# Altium PCB 8A8K最小系统.PcbDoc
Units mil, origin at the board's own origin, x right, y up, seen from the top; angles counter-clockwise.
Board outline 6000 x 4000 mil, 2 copper layers (Top Layer, Bottom Layer); 40 components, 71 nets, 206 pads, 185 vias.
Unrouted connection lines stored in the file: 5.
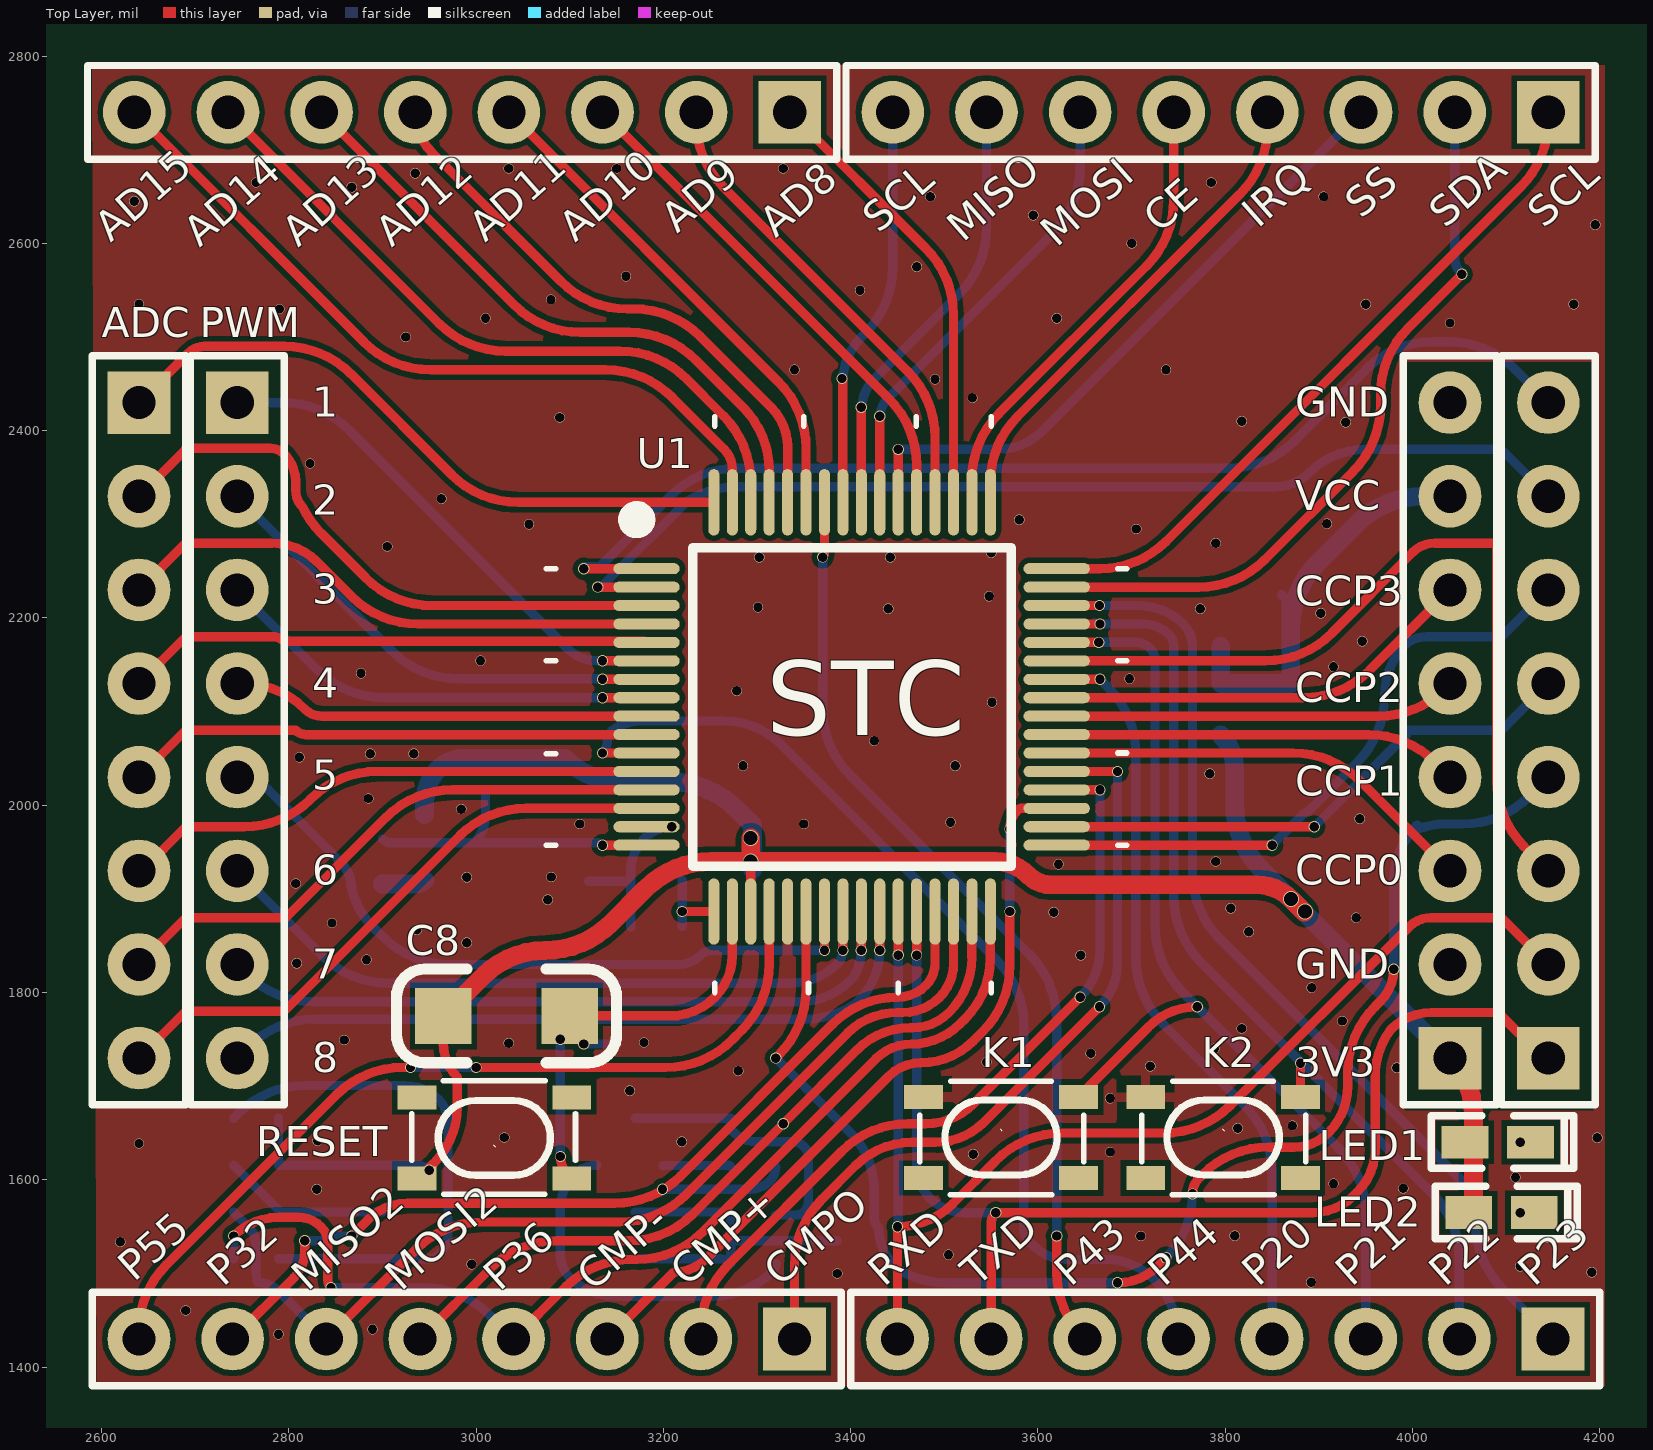
[diagram p0: Top Layer view]
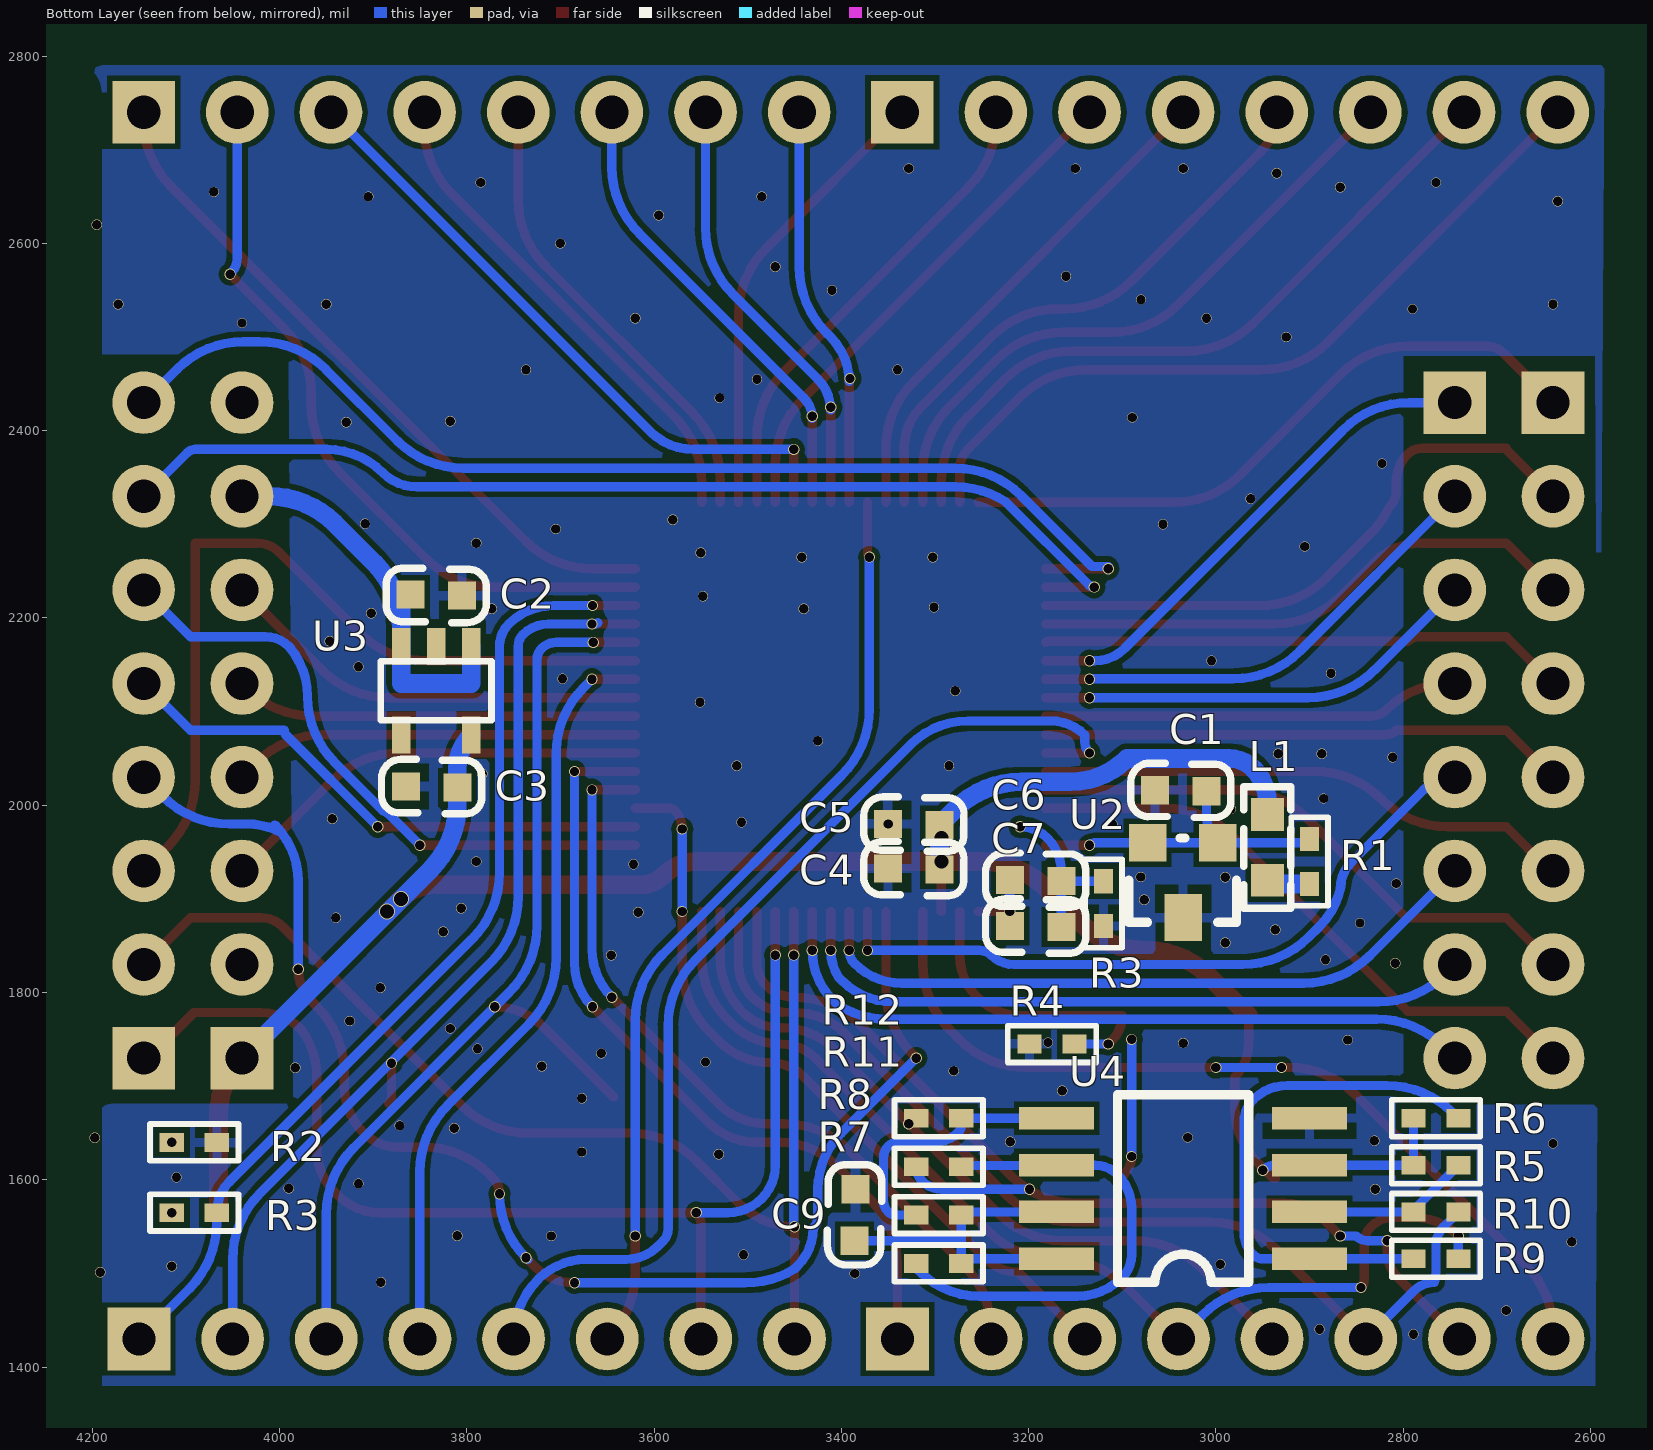
[diagram p1: Bottom Layer view, seen from below]

## Layer stack, top to bottom
Top Solder: solder mask 0.4, Solder Resist, Dk 3.5
Top Layer: signal copper 1.4
Dielectric 1: dielectric 12.6, FR-4, Dk 4.8
Bottom Layer: signal copper 1.4
Bottom Solder: solder mask 0.4, Solder Resist, Dk 3.5

## Board outline
1000,1000 7000,1000 7000,5000 1000,5000

## Design rules (kind name [scope] priority, off if disabled: settings)
Clearance [All] p1: gap=6 ignorepadtopadclearanceinfootprint=TRUE
PolygonConnect [All] p1: connectstyle=Relief reliefconductorwidth=10 reliefentries=4 polygonreliefangle="90 Angle" airgapwidth=10
RoutingVias [All] p1: holewidth=28 width=50 viastyle="Through Hole" minholewidth=28 minwidth=50 maxholewidth=28 maxwidth=50
SolderMaskExpansion [All] p1: expansion=4
Width [All] p1: maxlimit=100 minlimit=10 preferedwidth=10
30 further rules are at their usual default settings.

## Classes and differential pairs
component class 8A8K最小系统: C1 C2 C3 C4 C5 C6 C7 C8 C9 L1 LED1 LED2 R1 R2 R3 R4 R5 R6 R7 R8 R9 R10 R11 R12 U1 U2 U3

## Components (designator, comment, footprint, x,y, rotation, side; value= is the part's Value field where it differs from the comment)
C1 "0.1uF" 0603C 3009.79,2014.65 r0 bottom
C2 "1uF" 0603C 3860.21,2225.35 r180 bottom
C3 "1uF" 0603C 3809.79,2018.65 r0 bottom
C4 "0.1uF" 0603C 3294.85,1931 r0 bottom
C5 "47uF" 0603C 3294.85,1978.65 r0 bottom
C6 "22uF" 0603C 3164.79,1918.65 r0 bottom
C7 "0.1uF" 0603C 3164.79,1869.65 r0 bottom
C8 "22uF" 1206C 2965,1775.06 r0 top
C9 "1uF" 0603C 3384.49,1590.21 r270 bottom
K1 "KEY1" "ALPS key" 3555,1645 r90 top (schematic designator K2)
K2 "KEY2" "ALPS key" 3792.16,1645 r90 top (schematic designator K3)
L1 "220uH" 0603L 2945,1990 r270 bottom
LED1 "红色" "LED 0603R" 4091,1640 r0 top
LED2 "红色" "LED 0603R" 4095,1564.74 r0 top
R1 "511R" "R 0402_M" 2900,1940 r90 bottom
R2 "1K" "R 0402_M" 4091,1640 r180 bottom
R3 "1K" "R 0402_M" 4091,1565 r180 bottom
R3 "0R" "R 0402_M" 3120,1895 r90 bottom
R4 "331R" "R 0402_M" 3175,1745 r0 bottom
R5 "331R" "R 0402_M" 2765,1615.71 r0 bottom
R6 "331R" "R 0402_M" 2765,1665.77 r0 bottom
R7 "331R" "R 0402_M" 3296,1510.71 r180 bottom
R8 "331R" "R 0402_M" 3296,1562.4 r180 bottom
R9 "331R" "R 0402_M" 2765,1515.71 r0 bottom
R10 "331R" "R 0402_M" 2765,1565.71 r0 bottom
R11 "331R" "R 0402_M" 3296,1614.09 r0 bottom
R12 "331R" "R 0402_M" 3296,1665.77 r0 bottom
RESET "RESET" "ALPS key" 3025,1645 r270 top (schematic designator K1)
U1 "STC8A8K64S4A12" LQFP64-10*10 3401.52,2105 r270 top
U2 "TL431" SOT23 2993.12,1960.63 r0 bottom
U3 "LP5907" SOT23-5 3795.2,2169.49 r0 bottom
U4 "W25Q128" SOIC8 2900,1515.71 r0 bottom
? "HDR-1X8" HDR2.54-LI-8P 2990,1430 r180 top
? "HDR-1X8" HDR2.54-LI-8P 3800,1430 r180 top
? "HDR-1X8" HDR2.54-LI-8P 3795,2740 r180 top
? "HDR-1X8" HDR2.54-LI-8P 2985,2740 r180 top
? "HDR-1X8" HDR2.54-LI-8P 4040,2080 r90 top
? "HDR-1X8" HDR2.54-LI-8P 4145,2080 r90 top
? "HDR-1X8" HDR2.54-LI-8P 2745,2080 r270 top
? "HDR-1X8" HDR2.54-LI-8P 2640,2080 r270 top

## Footprints (in the part's own frame and the unit in brackets; to place one, negate y for a bottom-side part, rotate by r counter-clockwise, add the part's x,y. Pads: shape width x height; smd on the part's side, far side on the other; paste and mask are expansions set on the pad)
0603C [mil]
  rect 30x30 smd: 1(0.21,-0.35) 2(55.21,-1.35)
  silkscreen extent -26,-30 81,28, body extent -1,-15 62,17, height 12
0603L [mil] "小功率贴片电感"
  rect 35x35 smd: 1(0,0) 2(70,0)
  silkscreen extent -30,-25 100,25, body extent 4,-17 66,15, height 31
1206C [mil]
  rect 60x60 smd: 1(0,0) 2(135,0)
  silkscreen extent -50,-50 185,50, body extent 2,-31 128,31, height 39
"ALPS key" [mm]
  rect 0.65x1.05 smd: 1(1.106,-2.24) 2(1.106,1.96) 3(-1.094,-2.24) 4(-1.094,1.96)
  silkscreen extent -1.54,-2.38 1.53,2.06
HDR2.54-LI-8P [mm] "排针，8脚"
  rect 1.7x1.7 hole 0.9: 1(-8.89,0)
  round 1.7 hole 0.9: 2(-6.35,0) 3(-3.81,0) 4(-1.27,0) 5(1.27,0) 6(3.81,0) 7(6.35,0) 8(8.89,0)
  silkscreen extent -10.16,-1.27 10.16,1.27, body extent -10.16,-1.27 10.16,1.27, height 8.5
"LED 0603R" [mil] "红色0603LED"
  rect 50x35 smd: 1(-35,0.26) 2(35,0.26)
  silkscreen extent -71,-28 81,28, body extent -31,-16 31,16, height 18
LQFP64-10*10 [mm] "10x10mm，0.5mm（蒜米工坊）"
  oval 0.3x1.8 smd: 1(-3.75,-5.575) 2(-3.25,-5.575) 3(-2.75,-5.575) 4(-2.25,-5.575) 5(-1.75,-5.575) 6(-1.25,-5.575) 7(-0.75,-5.575) 8(-0.25,-5.575) 9(0.25,-5.575) 10(0.75,-5.575) 11(1.25,-5.575) 12(1.75,-5.575) 13(2.25,-5.575) 14(2.75,-5.575) 15(3.25,-5.575) 16(3.75,-5.575) 33(3.75,5.55) 34(3.25,5.55) 35(2.75,5.55) 36(2.25,5.55) 37(1.75,5.55) 38(1.25,5.55) 39(0.75,5.55) 40(0.25,5.55) 41(-0.25,5.55) 42(-0.75,5.55) 43(-1.25,5.55) 44(-1.75,5.55) 45(-2.25,5.55) 46(-2.75,5.55) 47(-3.25,5.55) 48(-3.75,5.55)
  oval 1.8x0.3 smd: 17(5.55,-3.75) 18(5.55,-3.25) 19(5.55,-2.75) 20(5.55,-2.25) 21(5.55,-1.75) 22(5.55,-1.25) 23(5.55,-0.75) 24(5.55,-0.25) 25(5.55,0.25) 26(5.55,0.75) 27(5.55,1.25) 28(5.55,1.75) 29(5.55,2.25) 30(5.55,2.75) 31(5.55,3.25) 32(5.55,3.75) 49(-5.55,3.75) 50(-5.55,3.25) 51(-5.55,2.75) 52(-5.55,2.25) 53(-5.55,1.75) 54(-5.55,1.25) 55(-5.55,0.75) 56(-5.55,0.25) 57(-5.55,-0.25) 58(-5.55,-0.75) 59(-5.55,-1.25) 60(-5.55,-1.75) 61(-5.55,-2.25) 62(-5.55,-2.75) 63(-5.55,-3.25) 64(-5.55,-3.75)
  silkscreen extent -5.33,-6.09 4.32,4.32, body extent -6,-6 6,6, height 1.45
"R 0402_M" [mil] "1/16W贴片电阻"
  rect 26x20 smd: 1(-24,0) 2(24,0)
  silkscreen extent -47,-20 47,20, body extent -20,-10 20,10, height 12
SOIC8 [mil]
  rect 80x24 smd: 1(0,0) 2(0,-50.06) 3(0,-100.06) 4(0,-150.06) 5(270,-150) 6(270,-100) 7(270,-50) 8(270,0)
  silkscreen extent 65,-175 205,25, body extent 13,-174 257,23, height 69
SOT23 [mil]
  rect 40x40 smd: 1(4.88,0.63) 3(79.88,0.63)
  rect 40x50 smd: 2(41.88,80.63)
  silkscreen extent -15,-4 100,86, body extent -15,-11 99,99, height 47
SOT23-5 [mm]
  rect 0.5x1 smd: 1(0,0) 2(0.95,0) 3(1.9,0) 4(1.9,2.4) 5(0,2.4)
  silkscreen extent -0.55,0.4 2.45,2, body extent -0.5,-0.2 2.4,2.6, height 1.09

## Part data
C1 C2 C3 C4 C5 C6 C7 C8 C9: library part CAP, "无极性电容"
K1 K2 RESET: library part KEY
L1: library part INDUCTOR, "INDUCTOR"
LED1 LED2: library part LED-SMD, "贴片LED", BOM名称=Ì, 学习资源=www.oooc
R1 R2 R3 R3 R4 R5 R6 R7 R8 R9 R10 R11 R12: library part RES
U1: BOM_LCSC Assembly=Yes, BOM_Manufacturer=STC, BOM_Manufacturer Part=STC8A8K64S4A12, BOM_Supplier=LCSC, BOM_Supplier Part=C86615, SMT Type=Extend, spicePre=U, spiceSymbolName=STC8A8K64S4A12
U2: BOM_LCSC Assembly=Yes, BOM_Manufacturer=SK, BOM_Manufacturer Part=TL431, BOM_Supplier=LCSC, BOM_Supplier Part=C111578, SMT Type=Extend, spicePre=U, spiceSymbolName=TL431
U3: library part LP5907QMFX-3.0Q1, BOM_LCSC Assembly=Yes, BOM_Manufacturer=TI, BOM_Manufacturer Part=LP5907QMFX-3.0Q1, BOM_Supplier=LCSC, BOM_Supplier Part=C132018, Contributor=LCSC, SMT Type=Extend, spicePre=U, spiceSymbolName=LP5907QMFX-3.0Q1
? ? ? ? ? ? ? ?: library part "Header 8", "8P接插件", BOM名称=8P接, 学习资源=www.ooocke.

## Via types
v1: diameter 11, hole 10, Top Layer to Bottom Layer, tented both sides, 124 vias
v2: diameter 12, hole 10, Top Layer to Bottom Layer, tented both sides, 57 vias
v3: diameter 17, hole 15, Top Layer to Bottom Layer, tented both sides, 4 vias

## Nets (pads, with @x,y where several pads share a name; then routed paths per layer and width w, separated by ;. In a path a pad name is that pad's centre, name@x,y a point inside that pad or via, vN(x,y) a via of type N, cw(c..) or ccw(c..) an arc to the next point about the centre after c; other vN are vias at no path point)
3V3: ?.1@4040,1730 C3.1 C4.1 C5.1 C8.1 C9.2 L1.1 LED1.1 LED2.1 R5.2 R6.2 R7.2 R8.2 RESET.1 U1.19 U3.5 U4.3 U4.7 U4.8 | length 2919.3
  Top Layer w10: RESET.1 ccw(c2936.8,1605.5) 2939.65,1602.64 2955,1618 ccw(c2894.64,1678.35) 2980,1678.35 2980,1709.64 cw(c3016.21,1745.86) 2965,1745.86 C8.1 ; U1.19 v3(3293.26,1940)
  Top Layer w20: C8.1 3007.61,1817.68 ; 3007.63,1817.69 cw(c3073.58,1751.71) 3073.58,1845 ccw(c3073.58,1945) 3144.29,1874.29 3180.71,1910.71 cw(c3251.42,1840) 3251.42,1940 v3(3293.26,1940) ; v3(3293.26,1965) v3(3293.26,1940) ; v3@3884.25,1885.75 v3(3870,1900) ccw(c3833.79,1863.79) 3833.79,1915 3614.14,1915 cw(c3614.14,1949.14) 3590,1925 ccw(c3553.79,1888.79) 3553.79,1940 v3(3293.26,1940) ; ?.1@4040,1730 cw(c3979.63,1669.63) 4065,1669.63 LED2.1@4065,1565
  Bottom Layer w10: R6.2 R5.2 2899.94,1615.71 U4.3 2936.46,1615.77 cw(c2936.46,1596.63) v2(2950,1610.17) ; U4.8 3259.93,1515.71 cw(c3259.93,1498.64) R7.2 3272,1536.55 ; U4.7 3264,1565.71 cw(c3264,1554.4) R8.2 3272,1536.55 ; C9.2 3275.75,1535 cw(c3275.75,1540.31) 3272,1536.55
  Bottom Layer w20: L1.1 2945,2003.05 cw(c2996.21,2003.05) 2960,2039.26 cw(c2985.92,2013.34) 2985.92,2050 3095,2050 ccw(c3155.36,2110.36) 3155.36,2025 3207.64,2025 cw(c3207.64,1925) 3278.35,1995.71 C5.1 C4.1 ; U3.5 cw(c3759.46,2039.26) 3810,2039.26 C3.1 3810,2001.42 ccw(c3910,2001.42) 3839.29,1930.71 ?.1@4040,1730
  other v3: 3885,1886.5
ADC0: ?.1@2640,2430 U1.64 | length 698.1
  Top Layer w10: ?.1@2640,2430 2692.93,2482.93 cw(c2710,2465.86) 2710,2490 2795.56,2490 cw(c2795.56,2390) 2866.27,2460.71 2974.19,2352.79 ccw(c3044.9,2423.5) 3044.9,2323.5 U1.64
ADC1: ?.2@2640,2330 U1.3 | length 650.1
  Top Layer w10: ?.2@2640,2330 2689.1,2379.1 ccw(c2686.94,2381.27) 2690,2381.27 2780,2381.27 cw(c2780,2359.76) 2795.21,2374.97 ; 2795.23,2374.95 cw(c2765.96,2345.72) 2797.63,2372.32 cw(c2765.96,2345.72) 2805.02,2359.32 cw(c2765.96,2345.72) 2807.32,2345.72 2807.32,2336.26 ccw(c2832.33,2336.26) 2814.65,2318.57 ccw(c2905,2361.42) 2834.29,2290.71 2882.44,2242.56 ccw(c2953.15,2313.27) 2953.15,2213.27 U1.3
ADC2: ?.3@2640,2230 U1.4 | length 591.3
  Top Layer w10: ?.3@2640,2230 2690,2280 2781.72,2280 cw(c2781.72,2211.72) 2830,2260 2867.13,2222.87 ccw(c2937.84,2293.58) 2937.84,2193.58 U1.4
ADC3: ?.4@2640,2130 U1.5 | length 564.4
  Top Layer w10: ?.4@2640,2130 2690,2180 2782.93,2180 cw(c2782.93,2162.93) 2795,2175 3179.36,2175 cw(c3179.36,2171.24) U1.5
ADC4: ?.5@2640,2030 U1.10 | length 563.9
  Top Layer w10: ?.5@2640,2030 2690,2080 2807.31,2080 ccw(c2818.24,2090.93) 2818.24,2075.47 U1.10
ADC5: ?.6@2640,1930 U1.12 | length 577.1
  Top Layer w10: ?.6@2640,1930 ccw(c2640,1937.13) 2645.04,1932.09 2690,1977.05 2752.34,1977.05 ccw(c2752.34,2077.05) 2823.05,2006.34 2823.53,2006.81 cw(c2894.24,1936.1) 2894.24,2036.1 U1.12
ADC6: ?.7@2640,1830 U1.13 | length 614.9
  Top Layer w10: ?.7@2640,1830 2690,1880 2796.72,1880 2903.84,1987.13 cw(c2974.55,1916.42) 2974.55,2016.42 U1.13
ADC7: ?.8@2640,1730 U1.14 | length 648.2
  Top Layer w10: ?.8@2640,1730 2690,1780 2795,1780 2982.44,1967.44 cw(c3053.15,1896.73) 3053.15,1996.73 U1.14
ADC8: ?.1@3335,2740 U1.51 | length 484.6
  Top Layer w10: ?.1@3335,2740 3480.5,2594.5 cw(c3409.79,2523.79) 3509.79,2523.79 U1.51
ADC9: ?.2@3235,2740 U1.52 | length 513.6
  Top Layer w10: ?.2@3235,2740 3235,2730.71 ccw(c3335,2730.71) 3264.29,2660 3460.82,2463.47 cw(c3390.11,2392.76) 3490.11,2392.76 U1.52
ADC10: ?.3@3135,2740 U1.53 | length 551.1
  Top Layer w10: ?.3@3135,2740 3441.13,2433.87 cw(c3370.42,2363.16) 3470.42,2363.16 U1.53
ADC11: ?.4@3035,2740 U1.59 | length 543.6
  Top Layer w10: ?.4@3035,2740 3323.02,2451.98 cw(c3252.31,2381.27) 3352.31,2381.27 U1.59
ADC12: ?.5@2935,2740 U1.60 | length 620.1
  Top Layer w10: ?.5@2935,2740 ccw(c2995.36,2740) 2952.68,2697.32 3090.71,2559.29 ccw(c3161.42,2630) 3161.42,2530 3168.58,2530 cw(c3168.58,2430) 3239.29,2500.71 3315,2425 cw(c3272.45,2382.45) 3332.63,2382.45 U1.60
ADC13: ?.6@2835,2740 U1.61 | length 680.8
  Top Layer w10: ?.6@2835,2740 3040.71,2534.29 ccw(c3111.42,2605) 3111.42,2505 3163.58,2505 cw(c3163.58,2405) 3234.29,2475.71 3285,2425 cw(c3217.55,2357.55) 3312.94,2357.55 U1.61
ADC14: ?.7@2735,2740 U1.62 | length 754.9
  Top Layer w10: ?.7@2735,2740 2960.71,2514.29 ccw(c3031.42,2585) 3031.42,2485 3153.58,2485 cw(c3153.58,2385) 3224.29,2455.71 3263.97,2416.03 cw(c3193.26,2345.32) 3293.26,2345.32 U1.62
ADC15: ?.8@2635,2740 U1.63 | length 829.3
  Top Layer w10: ?.8@2635,2740 2880.71,2494.29 ccw(c2951.42,2565) 2951.42,2465 3138.58,2465 cw(c3138.58,2365) 3209.29,2435.71 3265,2380 cw(c3244.31,2359.31) 3273.57,2359.31 U1.63
AGND: C6.1 C7.1 R3.2@3120,1919 U1.15 | length 176.3
  Bottom Layer w10: R3.2@3120,1919 C6.1 ; C7.1 C6.1 ; v2(3209.08,1977.05) ccw(c3209.08,1935.92) 3180,1965 ccw(c3216.21,1928.79) 3165,1928.79 C6.1
AVcc: C6.2 C7.2 L1.2 R1.1 U1.17 | length 129
  Top Layer w10: v2(3220,1886.5) U1.17
  Bottom Layer w10: C7.2 C6.2
  Bottom Layer w20: R1.1 2935.34,1916 ccw(c2935.34,1929.66) L1.2
AVref: C1.1 R1.2 U1.16 U2.1 U2.3 | length 342
  Top Layer w10: v2(3135,1957.36) U1.16
  Bottom Layer w10: R1.2 ccw(c2909.66,1973.66) 2909.66,1960 U2.1 ; C1.1 3010,1988.97 cw(c2969.03,1988.97) U2.1 ; v2(3135,1957.36) ccw(c3128.63,1950.99) 3128.63,1960 U2.3 U2.1
CCP0: ?.3@4040,1930 U1.38 | length 467.8
  Top Layer w10: U1.38 3872.79,2055.79 cw(c3872.79,1955.79) 3943.5,2026.5 ?.3@4040,1930
CCP1: ?.4@4040,2030 U1.39 | length 434.5
  Top Layer w10: U1.39 3953.11,2075.47 cw(c3953.11,1975.47) 4023.82,2046.18 ?.4@4040,2030
CCP2: ?.5@4040,2130 U1.40 | length 430.1
  Top Layer w10: U1.40 3963.74,2095.16 ccw(c3963.74,2195.16) 4034.45,2124.45 ?.5@4040,2130
CCP3: ?.6@4040,2230 U1.41 | length 463.4
  Top Layer w10: U1.41 3883.42,2114.84 ccw(c3883.42,2214.84) 3954.13,2144.13 ?.6@4040,2230
CE: ?.5@3745,2740 U1.50 | length 497.2
  Top Layer w10: U1.50 3529.48,2348.05 cw(c3629.48,2348.05) 3558.77,2418.77 3715.71,2575.71 ccw(c3645,2646.42) 3745,2646.42 ?.5@3745,2740
CMP+: ?.2@3240,1430 U1.36 | length 848.1
  Top Layer w10: ?.2@3240,1430 3240,1438.58 cw(c3340,1438.58) 3269.29,1509.29 3390.71,1630.71 cw(c3461.42,1560) 3461.42,1660 3480.31,1660 ccw(c3480.31,1731.67) 3530.99,1680.99 v2@3645.71,1795.71 ; U1.36 v2(3666.22,2016.42)
  Bottom Layer w10: v2(3645,1795) ccw(c3593.78,1846.22) 3666.22,1846.22 v2(3666.22,2016.42)
CMP-: ?.3@3140,1430 U1.35 | length 818.1
  Top Layer w10: ?.3@3140,1430 3211.46,1501.46 ccw(c3211.46,1549.75) 3245.61,1515.61 3440.86,1710.86 cw(c3475,1676.72) 3475,1725 ccw(c3475,1803.77) 3530.7,1748.07 3540.71,1758.08 ccw(c3470,1828.79) 3570,1828.79 v2(3570,1886.5) ; v2(3570,1974.6) cw(c3598.85,1974.6) 3578.45,1995 cw(c3582.63,1990.82) 3582.63,1996.73 U1.35
  Bottom Layer w10: v2(3570,1886.5) v2(3570,1974.6)
CMPO: ?.1@3340,1430 U1.37 | length 853.2
  Top Layer w10: ?.1@3340,1430 3340,1508.58 cw(c3440,1508.58) 3369.29,1579.29 3405,1615 cw(c3465.36,1554.64) 3465.36,1640 3490.11,1640 ccw(c3490.11,1714.17) 3542.56,1661.73 v2(3665.71,1784.88) ; U1.37 v2(3685,2036.1)
  Bottom Layer w10: v2(3665.71,1784.88) ccw(c3619.14,1831.45) 3685,1831.45 v2(3685,2036.1)
GND: ?.2@4040,1830 ?.8@4040,2430 C1.2 C2.2 C3.2 C4.2 C5.2 C9.1 K1.2 K2.2 R2.2 R3.1@3120,1871 R4.2 U1.21 U2.2 U3.2 U4.4
  other v1: 2789,1435 2889.31,1440.3 2690,1460.44 3891.66,1490.74 3385.75,1500 4191.41,1501.46 4115,1507.67 2995.19,1510 3504.51,1520 2620.1,1533.71 3709.64,1540 3810,1540.36 2829.7,1590 3990,1590.83 3915.53,1596 4110,1602.72 3530.99,1627.43 3677.01,1629.68 2640,1638.88 3219.55,1640.71 2830.71,1641.82 3030,1645.28 4197.25,1645 3813.19,1655 3871.71,1657.95 3677.01,1687.22 3164.02,1695 3280,1716.32 3983.18,1719.83 3720,1721.35 3545,1725.89 3656.42,1735 3788.45,1740 3035,1746.06 3179.36,1746.62 2859.11,1749.35 3817.68,1761.68 3924.82,1769.68 3892.2,1804.99 2808.61,1831.35 2882.91,1835.19 3645.71,1839.83 2990,1853.25 3825.1,1865 2936.46,1867.22 2846.11,1874.26 3939.7,1880 3616.85,1885.75 3805.94,1890 3076.55,1899 2807.32,1916.51 2990,1923.06 3080.16,1923.45 3621.85,1937.13 3790,1940 3110.71,1980 3350.06,1980 3506.55,1981.73 3943.5,1985.61 2984.1,1995.94 2885,2007.25 3783.45,2033.69 3285,2042.17 3511.55,2042.17 2811.33,2051.14 2887.01,2055 2933.3,2055 3425,2068.73 3550.89,2110 3278.35,2122.13 3697.75,2135 2877.11,2141.06 3915.53,2148.07 3004.68,2154.21 3946.2,2175 3902.07,2205 3440,2210 3773.15,2210 3301,2211.4 3547.78,2223.14 3302.44,2265 3442.35,2265 3550,2269.68 2905,2276.3 3790,2280 3705,2295 3056.43,2300 3908.55,2300.71 3580,2305 2962.94,2327.22 2822.69,2365 3928.64,2409.1 3817.68,2410 3089.23,2414.15 3530,2435 3490,2455 3340,2465 3736.72,2465 2925,2500 4040,2515 3010,2520 3620,2520 2790,2530 2640,2535 3950,2535 4172,2535 3080,2540 3410,2550 3160,2565 3470.42,2575 3700,2600 4195,2620 3595,2630 2635,2645 3485,2650 3905,2650 4070,2655 2867.13,2660 2765,2665 3785,2665 2935,2675 3035,2680 3150,2680 3327.94,2680
IRQ: ?.4@3845,2740 U1.49 | length 530.4
  Top Layer w10: U1.49 3549.16,2344.67 cw(c3649.16,2344.67) 3578.45,2415.38 3815.71,2652.64 ccw(c3745,2723.35) 3845,2723.35 ?.4@3845,2740
MISO: ?.7@3545,2740 U1.56 | length 468.4
  Top Layer w10: U1.56 v2(3411.37,2424.99)
  Bottom Layer w10: v2@3411.37,2422.08 cw(c3457.92,2422.08) 3425,2455 3515.71,2545.71 ccw(c3445,2616.42) 3545,2616.42 ?.7@3545,2740
MISO2: ?.6@2840,1430 R10.1 U1.30 | length 1068.6
  Top Layer w10: ?.6@2840,1430 2935.71,1525.71 cw(c3006.42,1455) 3006.42,1555 3153.58,1555 ccw(c3153.58,1655) 3224.29,1584.29 3396.54,1756.54 cw(c3450,1703.09) 3450,1778.69 3455.62,1778.69 ccw(c3455.62,1834.38) 3495,1795 ccw(c3459.29,1830.71) 3509.79,1830.71 U1.30
  Bottom Layer w10: R10.1 2756.72,1549.99 cw(c2736.73,1530) 2765,1530 2765,1502.73 ccw(c2811.28,1502.73) 2766.66,1490.46 cw(c2766.66,1459.34) 2788.66,1481.34 ?.6@2840,1430
MOSI: ?.6@3645,2740 U1.55 | length 501.5
  Top Layer w10: U1.55 v2(3431.05,2415.38)
  Bottom Layer w10: v2@3431.05,2413.39 cw(c3461.61,2413.39) 3440,2435 3615.71,2610.71 ccw(c3545,2681.42) 3645,2681.42 ?.6@3645,2740
MOSI2: ?.5@2940,1430 R12.2 U1.31 | length 809.5
  Top Layer w10: ?.5@2940,1430 3015.71,1505.71 cw(c3086.42,1435) 3086.42,1535 3163.58,1535 ccw(c3163.58,1630.03) 3230.77,1562.83 v2(3327.94,1660) 3406.81,1738.87 cw(c3463.56,1682.12) 3463.56,1762.37 3465.62,1762.37 ccw(c3465.62,1818.07) 3505,1778.69 ccw(c3445.91,1837.78) 3529.48,1837.78 U1.31
NetLED1_2: LED1.2 R2.1
  other v2: 4115,1640
NetLED2_2: LED2.2 R3.1@4115,1565
  other v2: 4115,1565
NetR5_1: R5.1 R10.2 U4.2 | length 180.7
  Bottom Layer w10: R5.1 2787.59,1569.12 cw(c2784.17,1565.71) R10.2 2899.94,1565.71 U4.2
NetR6_1: R6.1 R9.2 U4.1 | length 576.5
  Bottom Layer w10: R6.1 2746.65,1671.42 cw(c2817.36,1600.71) 2817.36,1700.71 2923.79,1700.71 cw(c2923.79,1649.5) 2960,1685.71 cw(c2935.86,1661.57) 2970,1661.57 2970,1543.99 cw(c2935.86,1543.99) 2960,1519.85 cw(c2950,1529.85) 2950,1515.71 U4.1 R9.2
NetR7_1: R7.1 R11.1 U4.6 | length 454.3
  Bottom Layer w10: 3129.14,1615.71 ccw(c3129.14,1581.57) 3105,1605.71 ccw(c3141.21,1569.5) 3090,1569.5 3090,1519.85 ccw(c3124.14,1519.85) 3100,1495.71 ccw(c3148.28,1543.99) 3148.28,1475.71 3252.57,1475.71 ccw(c3252.57,1566.07) 3316.46,1502.18 ccw(c3307.93,1510.71) R7.1 ; U4.6@3200,1615 3268.08,1615.71 cw(c3268.08,1610.17) R11.1
NetR8_1: R8.1 R12.1 U4.5 | length 300.5
  Bottom Layer w10: U4.5 3271.94,1665.71 R12.1 3272,1657.95 ccw(c3282.24,1657.95) 3275,1650.71 ccw(c3299.14,1674.85) 3299.14,1640.71 3337.93,1640.71 cw(c3337.93,1623.64) 3350,1635.71 cw(c3337.93,1623.64) 3355,1623.64 3355,1577.78 cw(c3337.93,1577.78) 3350,1565.71 cw(c3342,1573.71) 3342,1562.4 R8.1
P20: ?.4@3850,1430 U1.42 | length 813.9
  Top Layer w10: U1.42 v2(3666.22,2134.53)
  Bottom Layer w10: v2(3666.22,2134.53) 3675.27,2125.48 cw(c3604.55,2054.77) 3704.55,2054.77 3704.55,1836.87 ccw(c3804.55,1836.87) 3733.84,1766.16 3820.71,1679.29 cw(c3750,1608.58) 3850,1608.58 ?.4@3850,1430
P21: ?.3@3950,1430 K1.1 U1.44 | length 1088.7
  Top Layer w10: U1.44 v2(3665,2173.9) ; K1.1 3718.02,1763.35 cw(c3770,1711.37) v2(3770,1784.88)
  Bottom Layer w10: v2(3665,2173.9) 3704.55,2173.9 cw(c3704.55,2152.05) 3720,2167.5 cw(c3707.93,2155.43) 3725,2155.43 3725,1871.42 ccw(c3825,1871.42) 3754.29,1800.71 3920.71,1634.29 cw(c3850,1563.58) 3950,1563.58 ?.3@3950,1430
P22: ?.2@4050,1430 K2.1 U1.45 | length 1044.4
  Top Layer w10: U1.45 v2(3666.22,2193.58) ; v2(3880.36,1724.64) K2.1 ccw(c3889.76,1688.53) K2.1@3883.11,1681.89
  Bottom Layer w10: 3660,2195 ccw(c3663.42,2198.42) 3663.42,2193.58 v2(3666.22,2193.58) 3712.66,2193.58 cw(c3712.66,2154.92) 3740,2182.26 cw(c3727.93,2170.19) 3745,2170.19 3745,1902.84 ccw(c3845,1902.84) 3774.29,1832.13 4020.71,1585.71 cw(c3950,1515) 4050,1515 ?.2@4050,1430
P23: ?.1@4150,1430 R3.2@4067,1565 U1.46 | length 1055.3
  Top Layer w10: U1.46 v2(3665.71,2213.27)
  Bottom Layer w10: v2(3665.71,2213.27) 3707.48,2213.27 cw(c3707.48,2146.06) 3755,2193.58 cw(c3730.86,2169.44) 3765,2169.44 3765,1927.84 ccw(c3865,1927.84) 3794.29,1857.13 4053.27,1598.15 cw(c4020.11,1565) 4067,1565 4067,1554.42 ccw(c4167,1554.42) 4096.29,1483.71 ?.1@4150,1430
P32: ?.7@2740,1430 R11.2 U1.29 | length 1113.7
  Top Layer w10: ?.7@2740,1430 2805.3,1495.3 ccw(c2776.91,1523.69) 2817.06,1523.69 v2(2817.06,1535) ; v2(2867.13,1540) 2884.95,1557.82 cw(c2926.42,1516.35) 2926.42,1575 3148,1575 ccw(c3148,1675) 3218.71,1604.29 3380.72,1766.3 cw(c3450,1697.03) 3450,1795 ccw(c3450,1837.87) 3480.31,1807.56 ccw(c3456.67,1831.2) 3490.11,1831.2 U1.29
  Bottom Layer w10: v2(2817.06,1535) 2837.93,1535 ccw(c2837.93,1552.07) 2850,1540 v2@2867.5,1540 ; v2(3199,1590) 3292.87,1590 ccw(c3292.87,1619.28) 3313.57,1598.57 ccw(c3298.06,1614.09) R11.2
P35: ?.4@3040,1430 R9.1 U1.32 | length 1138.5
  Top Layer w10: v2(2741,1540) cw(c2789.28,1491.72) 2789.28,1560 2810.15,1560 cw(c2810.15,1525.86) 2834.29,1550 cw(c2816.28,1531.99) 2841.75,1531.99 2841.75,1492.85 ccw(c2852.85,1492.85) v2(2845,1485) ; ?.4@3040,1430 3095.81,1485.81 cw(c3166.29,1415.33) 3166.29,1515 3171.29,1515 ccw(c3171.29,1615) 3242,1544.29 3426.94,1729.24 cw(c3465,1691.18) 3465,1745 ccw(c3465,1817.8) 3516.48,1766.32 3522.58,1772.42 ccw(c3458.4,1836.6) 3549.16,1836.6 U1.32
  Bottom Layer w10: R9.1 v2(2741,1540) ; v2(2845,1485) 2943.58,1485 cw(c2943.58,1385) 3014.29,1455.71 ?.4@3040,1430
P43: ?.6@3650,1430 U1.58 | length 997.1
  Top Layer w10: v2(3370,2265) ccw(c3365.18,2269.82) 3372,2269.82 U1.58 ; v2(3620,1540) 3620,1501.42 ccw(c3720,1501.42) 3649.29,1430.71 ?.6@3650,1430
  Bottom Layer w10: v2(3370,2265) 3370,2103.13 ccw(c3470,2103.13) 3399.29,2032.42 3590.71,1841 cw(c3520,1770.29) 3620,1770.29 v2(3620,1540)
P44: ?.5@3750,1430 U1.11 | length 1114.8
  Top Layer w10: v2(3135,2055.79) U1.11
  Bottom Layer w10: v2(3135,2055.79) ccw(c3122.93,2067.86) 3140,2067.86 3140,2075 cw(c3176.21,2038.79) 3176.21,2090 3265,2090 cw(c3265,2003.63) 3326.07,2064.7 3555.71,1835.06 cw(c3485,1764.35) 3585,1764.35 3585,1547.07 ccw(c3602.07,1547.07) 3590,1535 3595.86,1529.14 ccw(c3630,1563.28) 3630,1515 3672.74,1515 cw(c3672.74,1443.22) 3723.5,1493.98 cw(c3659.52,1430) ?.5@3750,1430
P55: ?.8@2640,1430 U1.20 | length 931.2
  Top Layer w10: ?.8@2640,1430 2640,1438.58 cw(c2740,1438.58) 2669.29,1509.29 2850.71,1690.71 cw(c2921.42,1620) 2921.42,1720 v2(2930,1720) ; v2(3000,1720) 3202.54,1720 ccw(c3202.54,1820) 3273.26,1749.29 3283.65,1759.69 ccw(c3212.94,1830.4) 3312.94,1830.4 U1.20
  Bottom Layer w10: v2(2930,1720) v2(3000,1720)
PWM0: ?.1@2745,2430 U1.6 | length 545
  Top Layer w10: v2(3135,2154.21) U1.6
  Bottom Layer w10: ?.1@2745,2430 2793.58,2430 cw(c2793.58,2330) 2864.29,2400.71 3097.5,2167.5 ccw(c3129.58,2199.58) 3129.58,2154.21 v2(3135,2154.21)
PWM1: ?.2@2745,2330 U1.7 | length 513.6
  Top Layer w10: v2(3135,2134.53) U1.7
  Bottom Layer w10: ?.2@2745,2330 2910.71,2164.29 ccw(c2981.42,2235) 2981.42,2135 3133.86,2135 cw(c3133.86,2133.39) v2(3135,2134.53)
PWM2: ?.3@2745,2230 U1.8 | length 480.4
  Top Layer w10: v2(3135,2114.84) U1.8
  Bottom Layer w10: ?.3@2745,2230 2830.71,2144.29 ccw(c2901.42,2215) 2901.42,2115 3134.84,2115 v2(3135,2114.84)
PWM3: ?.4@2745,2130 U1.9 | length 446.3
  Top Layer w10: ?.4@2745,2130 2750.88,2130 cw(c2750.88,2035.56) 2817.66,2102.34 ccw(c2835,2119.68) 2835,2095.16 U1.9
PWM4: ?.5@2745,2030 U1.23 | length 778.5
  Top Layer w10: v2(3372,1845) U1.23
  Bottom Layer w10: ?.5@2745,2030 cw(c2745,1982.54) 2778.56,2016.1 2854.93,1939.73 ; 2854.95,1939.71 cw(c2824.57,1909.37) 2865.26,1923.06 ; 2867.5,1909.37 ccw(c2824.57,1909.37) 2865.26,1923.06 ; v2(3372,1845) 3252.07,1845 ccw(c3252.07,1827.93) 3240,1840 cw(c3215.86,1864.14) 3215.86,1830 2971.49,1830 cw(c2971.49,1930) 2900.77,1859.29 2889.46,1870.6 cw(c2948.51,1929.66) 2865.26,1923.06
PWM5: ?.6@2745,1930 U1.24 | length 749
  Top Layer w10: v2(3391.68,1845) U1.24
  Bottom Layer w10: ?.6@2745,1930 2835.71,1839.29 ccw(c2906.42,1910) 2906.42,1810 3335.37,1810 ccw(c3335.37,1881.38) 3385.84,1830.91 ccw(c3371.75,1845) v2(3391.68,1845)
PWM6: ?.7@2745,1830 U1.25 | length 749.6
  Top Layer w10: v2(3411.37,1845) U1.25
  Bottom Layer w10: ?.7@2745,1830 2755.71,1819.29 ccw(c2826.42,1890) 2826.42,1790 3344.64,1790 ccw(c3344.64,1867.26) 3399.27,1812.63 3402.96,1816.31 ccw(c3358.23,1845) v2(3411.37,1845)
PWM7: ?.8@2745,1730 U1.26 | length 782.4
  Top Layer w10: v2(3431.05,1845) U1.26
  Bottom Layer w10: ?.8@2745,1730 2757.4,1742.4 cw(c2828.11,1671.69) 2828.11,1771.69 3351.65,1771.69 ccw(c3351.65,1868.35) 3404.6,1787.48 3409.08,1791.96 ccw(c3356.04,1845) v2(3431.05,1845)
RESET: C8.2 R4.1 RESET.2 U1.18 | length 474.2
  Top Layer w10: v2(3090,1625) ccw(c3117.47,1625) RESET.2@3098.04,1605.58 ; v2(3115,1745) 3110.65,1749.35 cw(c3136.37,1775.06) C8.2 3214.22,1775.06 ccw(c3214.22,1776.74) 3215.4,1775.55 ccw(c3206.72,1843.28) 3255,1795 ccw(c3210.17,1839.83) 3273.57,1839.83 U1.18
  Bottom Layer w10: v2(3090,1625) v2(3090,1750) ; v2(3115,1745) R4.1
RXD: ?.2@4145,1830 ?.8@3450,1430 U1.27 | length 1295.3
  Top Layer w10: ?.8@3450,1430 v2(3450,1550) ccw(c3450,1633.28) 3508.89,1574.39 3555.21,1620.71 cw(c3625.92,1550) 3625.92,1650 3734.61,1650 ccw(c3734.61,1750) 3805.32,1679.29 3996.15,1870.12 cw(c4020,1846.27) 4020,1880 4095,1880 ?.2@4145,1830 ; v2(3450.74,1840) U1.27
  Bottom Layer w10: v2@3450.74,1550 v2(3450.74,1840)
RXD2: ?.4@4145,2030 U1.22 | length 1500.6
  Top Layer w10: v2@3323.02,1733.02 ccw(c3252.31,1803.73) 3352.31,1803.73 U1.22 ; v2(3685,1490) ccw(c3685,1550.36) 3727.67,1507.67 v2(3736.72,1516.72) ; v2(3765,1585) cw(c3789.14,1585) 3772.07,1602.07 3775.71,1605.71 cw(c3846.42,1535) 3846.42,1635 3873.79,1635 ccw(c3873.79,1686.21) 3910,1650 ccw(c3860,1700) 3930.71,1700 3930.71,1714.29 cw(c4030.71,1714.29) 3960,1785 3965.86,1790.86 ccw(c3931.72,1825) v2(3980,1825)
  Bottom Layer w10: v2(3320,1730) 3400.25,1649.75 cw(c3340.5,1590) 3425,1590 3425,1560.65 ccw(c3442.07,1560.65) 3430,1548.58 ccw(c3487.28,1548.58) 3446.78,1508.07 3449.94,1504.91 ccw(c3502.47,1590) 3502.47,1490 v2(3685,1490) ; v2@3735,1515 v2(3736.72,1516.72) ccw(c3668.43,1585) v2(3765,1585) ; v2(3980,1825) 3980,1918.64 cw(c4065.36,1918.64) 3997.58,1970.53 ; 4005,1979 ccw(c4065.36,1918.64) 3997.58,1970.53 ; ?.4@4145,2030 4124.29,2009.29 cw(c4053.58,2080) 4053.58,1980 4034.65,1980 ccw(c4034.65,1902.71) 3997.58,1970.53
RXD3: ?.6@4145,2230 U1.33 | length 674.4
  Top Layer w10: U1.33 v2(3850,1957.36)
  Bottom Layer w10: v2(3850,1957.36) 3882.43,1989.79 cw(c3895,1977.23) 3889.43,1994.1 3940.71,2045.39 ccw(c3870,2116.1) 3970,2116.1 cw(c4051.85,2116.1) 3989.53,2169.15 ; 3987.87,2167.5 3989.53,2169.15 ; ?.6@4145,2230 4095,2180 4015,2180 ccw(c4015,2144.68) 3990.03,2169.66 3989.53,2169.15
RXD4: ?.8@4145,2430 U1.1 | length 1206.1
  Top Layer w10: v2(3115,2252.64) U1.1
  Bottom Layer w10: v2@3115,2255 3132.36,2255 3208.07,2330.71 cw(c3278.78,2260) 3278.78,2360 3803.58,2360 ccw(c3803.58,2460) 3874.29,2389.29 3950.71,2465.71 cw(c4021.42,2395) 4021.42,2495 4038.58,2495 cw(c4038.58,2395) 4109.29,2465.71 ?.8@4145,2430
SCL: ?.1@4145,2740 U1.48 | length 747.5
  Top Layer w10: U1.48 3666.22,2252.64 ccw(c3666.22,2352.64) 3736.93,2281.93 4115.71,2660.71 ccw(c4045,2731.42) 4145,2731.42 ?.1@4145,2740
SCLK: ?.8@3445,2740 U1.57 | length 434.9
  Top Layer w10: v2(3390.71,2455.71) cw(c3388.37,2453.37) 3391.68,2453.37 U1.57
  Bottom Layer w10: v2@3391.68,2452.48 cw(c3458.89,2452.48) 3411.37,2500 3415.71,2504.34 ccw(c3345,2575.06) 3445,2575.06 ?.8@3445,2740
SDA: ?.2@4045,2740 U1.47 | length 811.3
  Top Layer w10: U1.47 3771.53,2232.95 ccw(c3771.53,2332.95) 3842.24,2262.24 3936.57,2356.57 ccw(c3865.86,2427.28) 3965.86,2427.28 3965.86,2438.73 cw(c4065.86,2438.73) 3995.15,2509.44 v2(4052.68,2566.97) ; ?.2@4045,2740 ?.2@4045,2762.93
  Bottom Layer w10: ?.2@4045,2740 4045,2585.5 ccw(c4071.21,2585.5) v2(4052.68,2566.97)
SS: ?.3@3945,2740 U1.54 | length 697
  Top Layer w10: U1.54 v2(3450.74,2380)
  Bottom Layer w10: v2(3450.74,2380) 3557.72,2380 ccw(c3557.72,2445.86) 3604.29,2399.29 ?.3@3945,2740
TXD: ?.1@4145,1730 ?.7@3550,1430 U1.28 | length 1290.6
  Top Layer w10: v2(3470.42,1840) U1.28 ; ?.7@3550,1430 3550,1552.93 cw(c3567.07,1552.93) v2(3555,1565) 3893.73,1565 ccw(c3893.73,1625.65) 3936.62,1582.77 3941.93,1588.07 ccw(c3898.3,1631.7) 3960,1631.7 3960,1709.64 cw(c4045.36,1709.64) 3977.05,1760.83 cw(c4020.15,1717.73) 4020.15,1778.69 4090,1778.69 cw(c4090,1775.52) 4092.24,1777.76 4136.46,1733.54 ccw(c4145,1742.07) 4145,1730 cw(c4145,1733.17) ?.1@4142.76,1730.92
  Bottom Layer w10: v2(3470.42,1840) 3470.42,1615.2 ccw(c3520.2,1615.2) 3485,1580 ccw(c3521.21,1616.21) 3521.21,1565 v2(3555,1565)
TXD2: ?.3@4145,1930 U1.43 | length 884.8
  Top Layer w10: U1.43 3842.79,2154.21 ccw(c3842.79,2254.21) 3913.5,2183.5 4000.23,2270.23 cw(c4023.82,2246.64) 4023.82,2280 4090,2280 4090,2026.42 ccw(c4190,2026.42) 4119.29,1955.71 ?.3@4145,1930
TXD3: ?.5@4145,2130 U1.34 | length 599.2
  Top Layer w10: U1.34 v2(3895,1977.05)
  Bottom Layer w10: v2(3895,1977.05) 3992.91,2074.96 ccw(c3987.87,2080) 3995,2080 4095,2080 4145,2130 ccw(c4145,2117.93) ?.5@4136.46,2126.46
TXD4: ?.7@4145,2330 U1.2 | length 1138.4
  Top Layer w10: v2(3130,2232.95) U1.2
  Bottom Layer w10: v2(3130,2232.95) ccw(c3130,2241.19) 3135.83,2235.37 3224.91,2324.45 cw(c3278.47,2240) 3278.47,2340 3853.22,2340 ccw(c3853.22,2391.21) 3889.43,2355 cw(c3949.79,2294.64) 3949.79,2380 4090,2380 cw(c4090,2367.93) 4098.54,2376.46 ?.7@4145,2330
VCC: ?.7@4040,2330 C2.1 U3.1 U3.3 | length 457.7
  Bottom Layer w10: C2.1 C2.1@3870,2215
  Bottom Layer w20: U3.1 3795.2,2130 3870,2130 U3.3 U3.3@3870,2188.58 ; C2.1@3870,2215 U3.3@3870,2188.58 ; ?.7@4040,2330 4011.42,2330 ccw(c4011.42,2230) 3940.71,2300.71 3899.29,2259.29 ccw(c3970,2188.58) U3.3@3870,2188.58
pads on no net: K1.3 K1.4 K2.3 K2.4 RESET.3 RESET.4 U3.4

## Polygon pours and split planes (outlines as drawn)
GND on Top Layer "Top Layer-GND" (solid, pour order 0): 2590,2790 4205,2790 4205,1380 2595,1380
GND on Bottom Layer "Bottom Layer-GND" (solid, pour order 2): 2585,2790 4187.93,2790 cw(c4187.93,2772.93) 4200,2785 ccw(c4225.64,2759.36) 4189.38,2759.36 4189.38,1380 2595,1380

## Other copper
Top Layer:
  pour cut-out: 3991.21,2473.44 4194.59,2473.44 ccw(c4194.59,2477.2) 4197.25,2474.54 ccw(c4206.83,2464.96) 4193.28,2464.96 4193.28,1674.01 3991.21,1674.01
  pour cut-out: 2590,2477.78 2793.38,2477.78 ccw(c2793.38,2481.54) 2796.04,2478.88 ccw(c2805.63,2469.3) 2792.07,2469.3 2792.07,1678.35 2590,1678.35
Bottom Layer:
  pour cut-out: 3990,2481.46 4195,2481.46 4195,1688.54 cw(c4177.93,1688.54) 4190,1676.46 ccw(c4177.93,1664.39) 4177.93,1681.46 3985,1681.46
  pour cut-out: 2595,2480 2800,2480 2800,1687.07 cw(c2782.93,1687.07) 2795,1675 ccw(c2782.93,1662.93) 2782.93,1680 2590,1680

## Silkscreen, mask and mechanical layers (free items; w line width, h text height)
Top Overlay:
  lines w6: 3075,1957.36 3085,1957.36 ; 3075,2055 3085,2055 ; 3075,2154.21 3085,2154.21 ; 3075,2252.64 3085,2252.64 ; 3255,1800 3255,1810 ; 3255,2405 3255,2415 ; 3350,2405 3350,2415 ; 3355,1800 3355,1810 ; 3450.74,1800 3450.74,1810 ; 3470,2405 3470,2415 ; 3550,1800 3550,1810 ; 3550,2405 3550,2415 ; 3685,1957.36 3695,1957.36 ; 3685,2055.79 3695,2055.79 ; 3685,2154.21 3695,2154.21 ; 3685,2252.64 3695,2252.64
  text "SS" at 3945,2625 h32 r41.42
  text "IRQ" at 3835,2615 h32 r41.42
  text "SDA" at 4035,2615 h32 r41.42
  text "SCL" at 4140,2615 h32 r41.42
  text "AD9" at 3215,2610 h32 r41.42
  text "SCL" at 3430,2610 h32 r41.42
  text "CE" at 3730,2610 h32 r41.42
  text "AD8" at 3320,2605 h32 r41.42
  text "AD15" at 2610,2600 h32 r41.42
  text "AD11" at 3010,2600 h32 r41.42
  text "AD10" at 3106.13,2600 h32 r41.42
  text "MISO" at 3520,2600 h32 r41.42
  text "AD14" at 2705,2595 h32 r41.42
  text "AD13" at 2810,2595 h32 r41.42
  text "AD12" at 2910,2595 h32 r41.42
  text "MOSI" at 3620,2595 h32 r41.42
  text "ADC" at 2600,2500 h32
  text "PWM" at 2705,2500 h32
  text "1" at 2825,2415 h32
  text "GND" at 3875,2415 h32
  text "VCC" at 3875,2315 h32
  text "2" at 2825,2310 h32
  text "3" at 2825,2215 h32
  text "CCP3" at 3875,2213.27 h32
  text "4" at 2825,2115 h32
  text "CCP2" at 3875,2110 h32
  text "STC" at 3310,2075 h80
  text "5" at 2825,2016.42 h32
  text "CCP1" at 3875,2010 h32
  text "6" at 2825,1915 h32
  text "CCP0" at 3875,1915 h32
  text "7" at 2825,1815 h32
  text "GND" at 3875,1815 h32
  text "8" at 2825,1715 h32
  text "3V3" at 3875,1710 h32
  text "P55" at 2635,1490 h32 r41.42
  text "P32" at 2730,1485 h32 r41.42
  text "CMP+" at 3225,1485 h32 r41.42
  text "CMPO" at 3325,1485 h32 r41.42
  text "RXD" at 3435.74,1485 h32 r41.42
  text "TXD" at 3535,1485 h32 r41.42
  text "P43" at 3635,1485 h32 r41.42
  text "P44" at 3735,1485 h32 r41.42
  text "P20" at 3835,1485 h32 r41.42
  text "P21" at 3935,1485 h32 r41.42
  text "P22" at 4035,1485 h32 r41.42
  text "P23" at 4130,1485 h32 r41.42
  text "MISO2" at 2820,1480 h32 r41.42
  text "MOSI2" at 2920,1480 h32 r41.42
  text "P36" at 3025,1480 h32 r41.42
  text "CMP-" at 3125,1480 h32 r41.42